# EAGLE board Bio Dome PiV (EAGLE 9.6.2), part 1 of 2
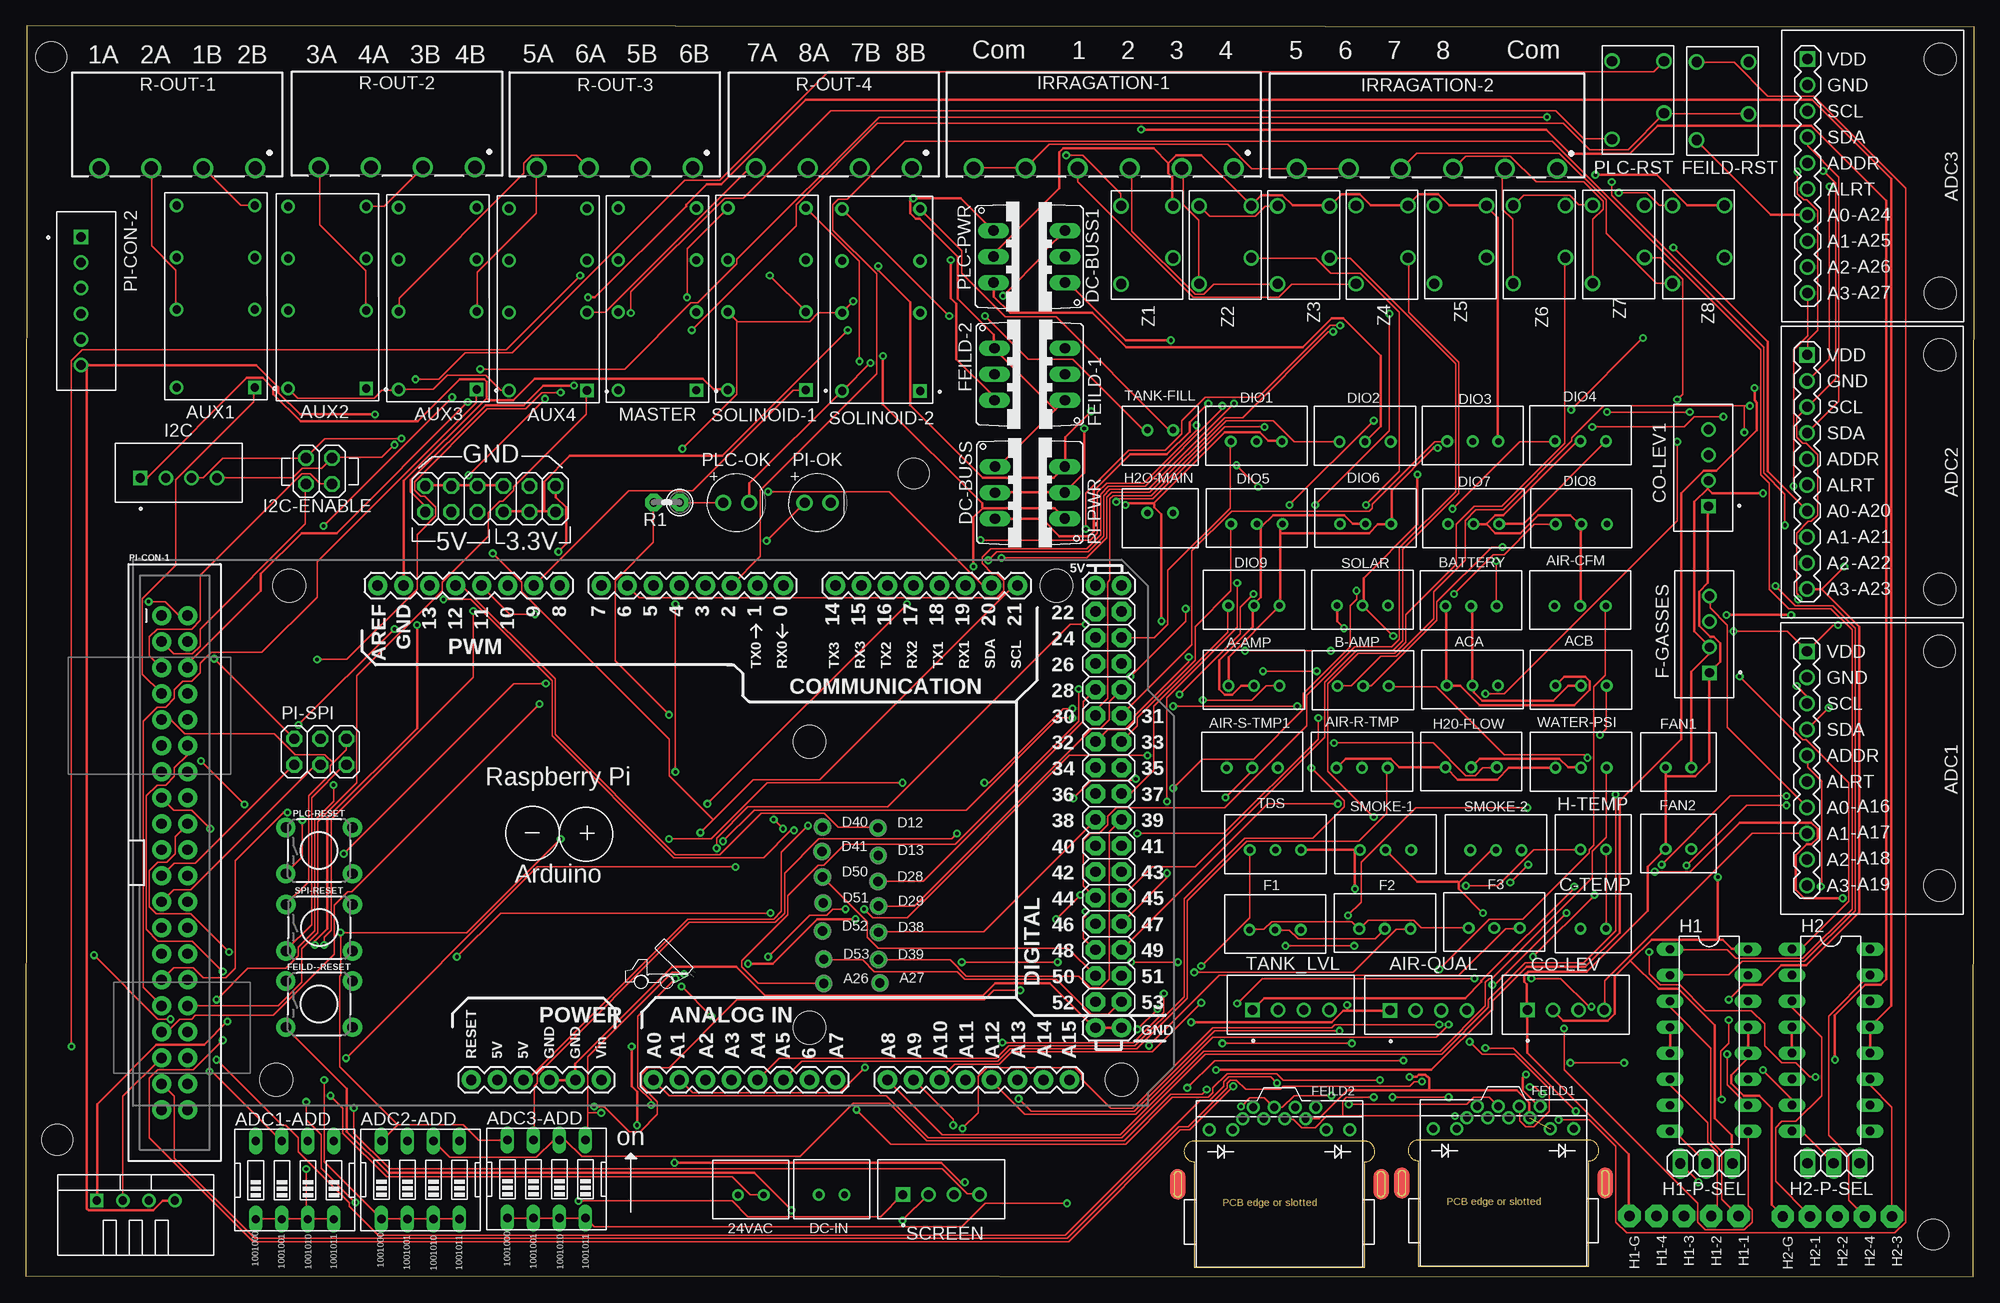
[diagram p0: board, top side]
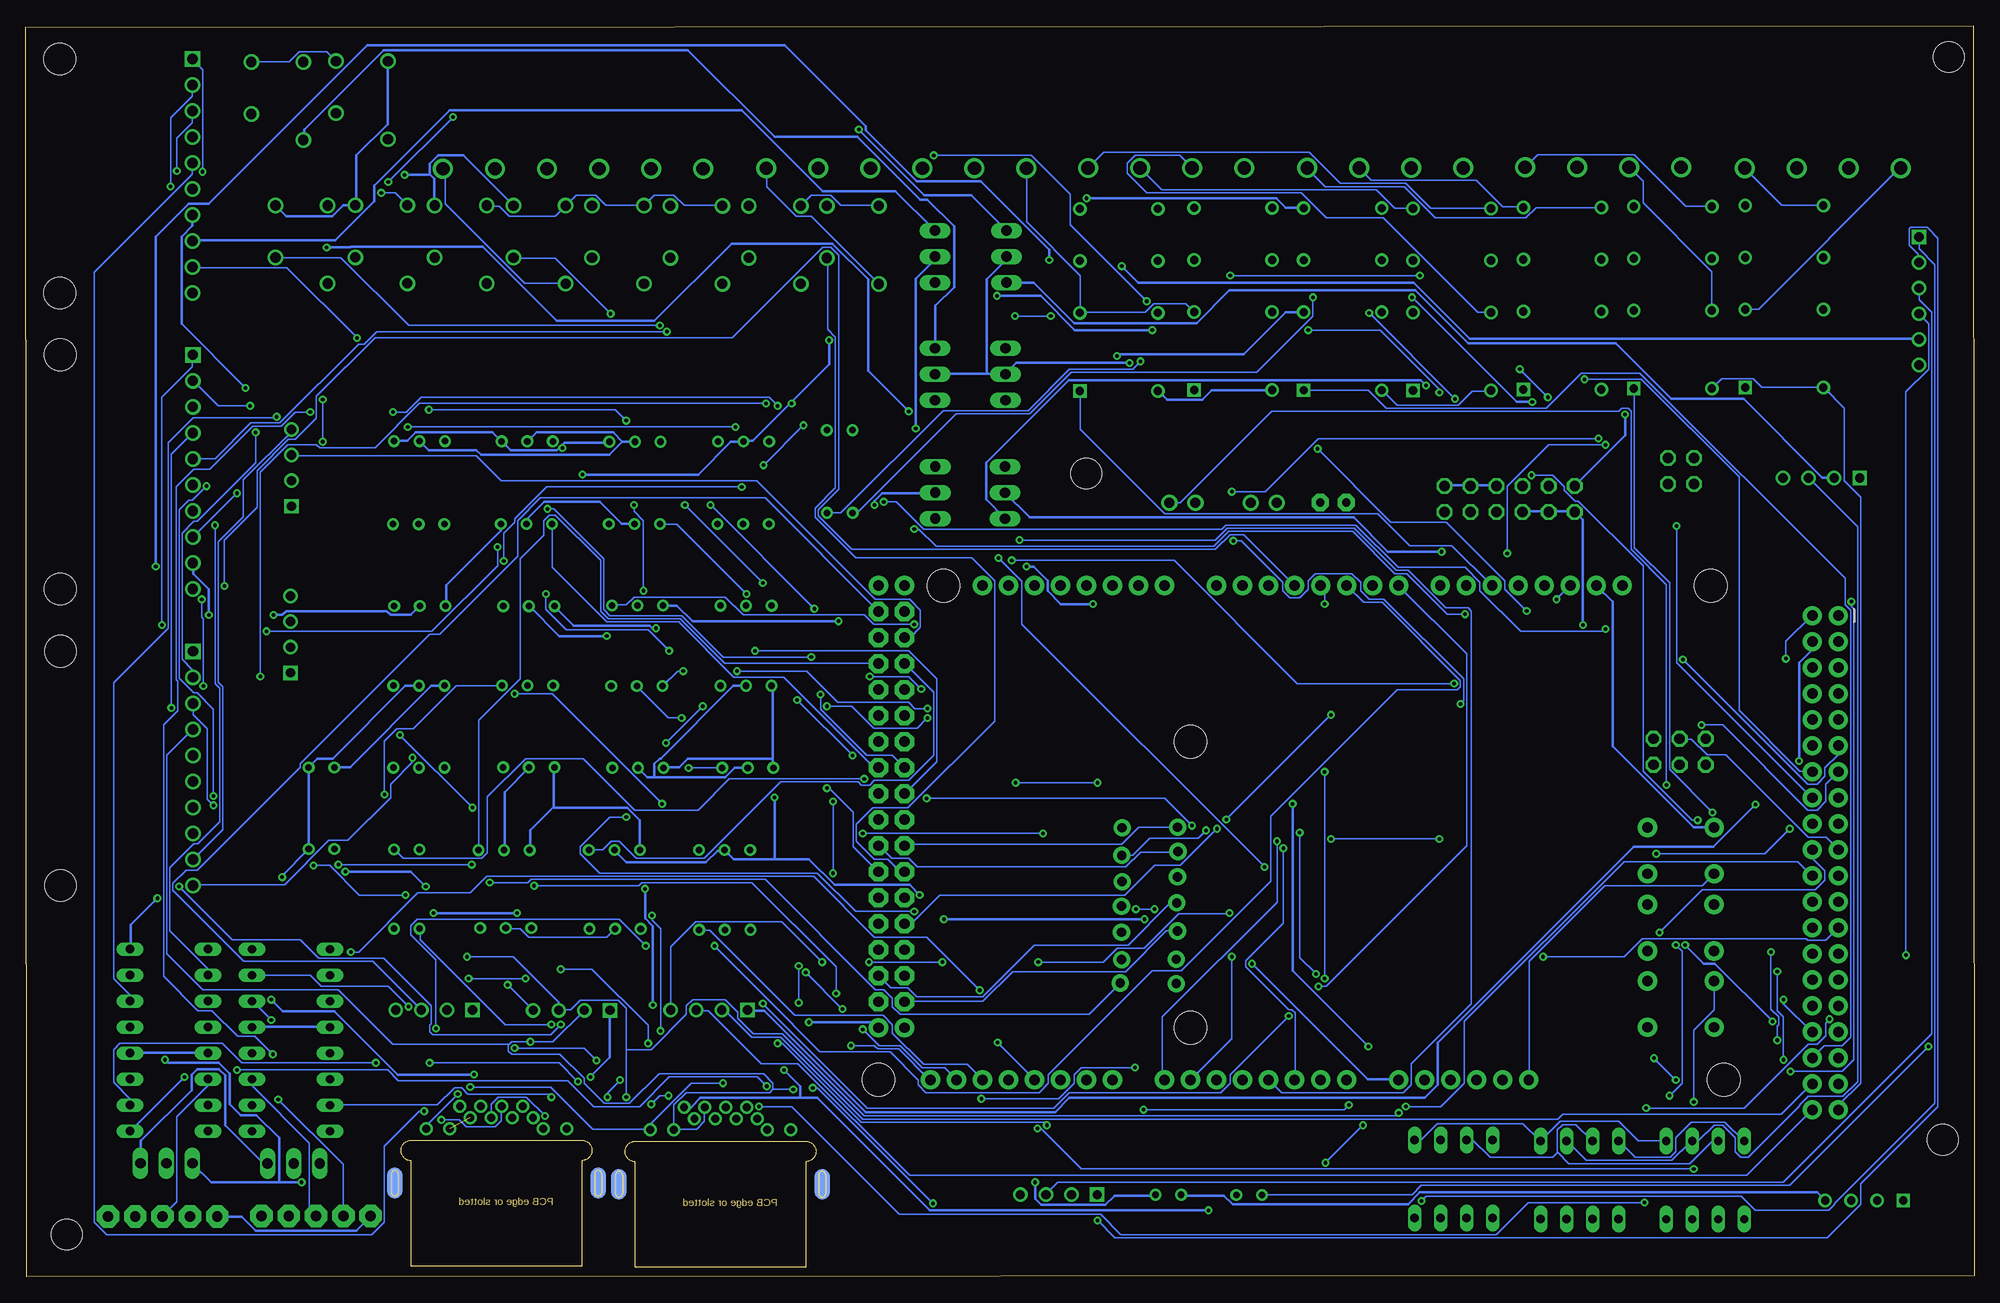
[diagram p1: board, bottom side, seen from below]

Size 190.31 x 122.19 mm. Coordinates in mm from the lower left corner, seen from the top.
Outline: 0,0.09 190.17,0 190.31,122.02 0.1,122.19 0,0.09
Copper layers (1*16): Top 0.035mm / dielectric 0.15mm / Bottom 0.035mm
Design rules "default *": minimum track width 6mil, minimum drill 0.35mm, track to track 6mil, track to pad 6mil, pad to pad 6mil, via to via 6mil, smd to smd 6mil, copper to edge 40mil, drill to drill 6mil, minimum pad ring 10mil, minimum via ring 8mil, stop-mask expansion 4mil, vias tented up to drill 0mil, thermal gap 10mil
Net classes: 1 Power: width 0.254 mm
Holes 3 mm at 3.09,13.38 2.5,119.12 186.28,4.14 86.73,78.46

## Footprints (pad centres in the part's own frame; a part is rotated, then mirrored left to right if it is on the bottom)
B2B-XH-A = drill 0.64: 1 0,0; 2 2.5,0
TESTPOINT_PAD-036 = drill 0.914 pad 1.676: 1 0,0
B3B-XH-A = drill 0.64: 1 0,0; 2 2.5,0; 3 5,0
ADC-4CH-ADS1115 = drill 1 square: 1 -6.35,11.43 | drill 1: 2 -6.35,8.89; 3 -6.35,6.35; 4 -6.35,3.81; 5 -6.35,1.27; 6 -6.35,-1.27; 7 -6.35,-3.81; 8 -6.35,-6.35; 9 -6.35,-8.89; 10 -6.35,-11.43 | hole 3.1: 6.604,11.43; 6.604,-11.43
EDG-04 = drill 0.813 long: 1 -3.81,-3.81; 2 -1.27,-3.81; 3 1.27,-3.81; 4 3.81,-3.81; 5 3.81,3.81; 6 1.27,3.81; 7 -1.27,3.81; 8 -3.81,3.81
B4B-XH-A(LF)(SN) = drill 0.9 square: 1 -3.75,0 | drill 0.9: 2 -1.25,0; 3 1.25,0; 4 3.75,0
C93432 = drill 0.8 square: 1 -10.16,-3.81 | drill 0.8: 4 -2.54,-3.81; 6 2.54,-3.81; 8 7.62,-3.81; 9 7.62,3.81; 11 2.54,3.81; 13 -2.54,3.81; 16 -10.16,3.81
ARDUINO_MEGA = drill 1.016 pad 1.88: 0 13.97,24.13; 1 11.43,24.13; 2 8.89,24.13; 3 6.35,24.13; 3.3V -13.97,-24.13; 4 3.81,24.13; 5 1.27,24.13; 5V@0 -11.43,-24.13; 5V@1 44.45,24.13; 5V@2 46.99,24.13; 6 -1.27,24.13; 7 -3.81,24.13; 8 -7.874,24.13; 9 -10.414,24.13; 10 -12.954,24.13; 11 -15.494,24.13; 12 -18.034,24.13; 13 -20.574,24.13; 14 19.05,24.13; 15 21.59,24.13; 16 24.13,24.13; 17 26.67,24.13; 18 29.21,24.13; 19 31.75,24.13; 20 34.29,24.13; 21 36.83,24.13; A0 1.27,-24.13; A1 3.81,-24.13; A2 6.35,-24.13; A3 8.89,-24.13; A4 11.43,-24.13; A5 13.97,-24.13; A6 16.51,-24.13; A7 19.05,-24.13; A8 24.13,-24.13; A9 26.67,-24.13; A10 29.21,-24.13; A11 31.75,-24.13; A12 34.29,-24.13; A13 36.83,-24.13; A14 39.37,-24.13; A15 41.91,-24.13; AREF -25.654,24.13; GND@0 -8.89,-24.13; GND@1 -6.35,-24.13; GND@2 44.45,-19.05; GND@3 46.99,-19.05; GND@4 -23.114,24.13; RESET -16.51,-24.13; VIN -3.81,-24.13 | drill 1.016 pad 1.88 octagon: 22 44.45,21.59; 23 46.99,21.59; 24 44.45,19.05; 25 46.99,19.05; 26 44.45,16.51; 27 46.99,16.51; 28 44.45,13.97; 29 46.99,13.97; 30 44.45,11.43; 31 46.99,11.43; 32 44.45,8.89; 33 46.99,8.89; 34 44.45,6.35; 35 46.99,6.35; 36 44.45,3.81; 37 46.99,3.81; 38 44.45,1.27; 39 46.99,1.27; 40 44.45,-1.27; 41 46.99,-1.27; 42 44.45,-3.81; 43 46.99,-3.81; 44 44.45,-6.35; 45 46.99,-6.35; 46 44.45,-8.89; 47 46.99,-8.89; 48 44.45,-11.43; 49 46.99,-11.43; 50 44.45,-13.97; 51 46.99,-13.97; 52 44.45,-16.51; 53 46.99,-16.51 | hole 3.2: -34.29,24.13; -35.56,-24.13; 16.51,8.89; 16.51,-19.05; 40.64,24.13; 46.99,-24.13
2X06 = drill 1.016 octagon: 1 -6.35,-1.27; 2 -6.35,1.27; 3 -3.81,-1.27; 4 -3.81,1.27; 5 -1.27,-1.27; 6 -1.27,1.27; 7 1.27,-1.27; 8 1.27,1.27; 9 3.81,-1.27; 10 3.81,1.27; 11 6.35,-1.27; 12 6.35,1.27
TO220V = drill 1.016 long: 1 -2.54,-2.54; 2 0,-2.54; 3 2.54,-2.54
RJ45-12+2P-16.3X15.4X11.5MM-IN = drill 0.762 pad 1.27: 1 3.57,7.5; 2 2.55,6.4; 3 1.53,7.5; 4 0.51,6.4; 5 -0.51,7.5; 6 -1.53,6.4; 7 -2.55,7.5; 8 -3.57,6.4; 9 6.86,5.32; 10 4.57,5.32; 11 -4.57,5.32; 12 -6.86,5.32 | smd 1.5 x 3 bottom: 13B -9.931,0; 14B 9.92,0 | smd 1.5 x 3: 13T -9.931,0; 14T 9.92,0
TACTILE_SWITCH_PTH_6.0MM = drill 1.016 pad 1.88: 1 -3.251,2.261; 2 3.251,2.261; 3 -3.251,-2.261; 4 3.251,-2.261
G6L-1PDC5 = drill 1: 2 -3.81,2.54; 4 3.81,2.54; 5 3.81,-2.54; 8 -1.27,-2.54
DIL16 = drill 0.813 long: 1 -8.89,-3.81; 2 -6.35,-3.81; 3 -3.81,-3.81; 4 -1.27,-3.81; 5 1.27,-3.81; 6 3.81,-3.81; 7 6.35,-3.81; 8 8.89,-3.81; 9 8.89,3.81; 10 6.35,3.81; 11 3.81,3.81; 12 1.27,3.81; 13 -1.27,3.81; 14 -3.81,3.81; 15 -6.35,3.81; 16 -8.89,3.81
DPADS_0400-S = drill 1.016 pad 2.184 octagon: PAD 0,0
1X03 = drill 1.016 long: 1 -2.54,0; 2 0,0; 3 2.54,0
2X02 = drill 1.016 octagon: 1 -1.27,-1.27; 2 -1.27,1.27; 3 1.27,-1.27; 4 1.27,1.27
691241500006 = drill 1.3: 1 -12.7,0; 2 -7.62,0; 3 -2.54,0; 4 2.54,0; 5 7.62,0; 6 12.7,0
2X20_SHROUDED = drill 1.016 pad 1.88: 1 -1.27,24.13; 2 1.27,24.13; 3 -1.27,21.59; 4 1.27,21.59; 5 -1.27,19.05; 6 1.27,19.05; 7 -1.27,16.51; 8 1.27,16.51; 9 -1.27,13.97; 10 1.27,13.97; 11 -1.27,11.43; 12 1.27,11.43; 13 -1.27,8.89; 14 1.27,8.89; 15 -1.27,6.35; 16 1.27,6.35; 17 -1.27,3.81; 18 1.27,3.81; 19 -1.27,1.27; 20 1.27,1.27; 21 -1.27,-1.27; 22 1.27,-1.27; 23 -1.27,-3.81; 24 1.27,-3.81; 25 -1.27,-6.35; 26 1.27,-6.35; 27 -1.27,-8.89; 28 1.27,-8.89; 29 -1.27,-11.43; 30 1.27,-11.43; 31 -1.27,-13.97; 32 1.27,-13.97; 33 -1.27,-16.51; 34 1.27,-16.51; 35 -1.27,-19.05; 36 1.27,-19.05; 37 -1.27,-21.59; 38 1.27,-21.59; 39 -1.27,-24.13; 40 1.27,-24.13
B6B-XH-A(LF)(SN) = drill 0.9 square: 1 -6.25,0 | drill 0.9: 2 -3.75,0; 3 -1.25,0; 4 1.25,0; 5 3.75,0; 6 6.25,0
LEDRD254W60D565H860B_B = drill 0.981 pad 1.581: 1 -1.27,0; 2 1.27,0
2X03 = drill 1.016 octagon: 1 -2.54,-1.27; 2 -2.54,1.27; 3 0,-1.27; 4 0,1.27; 5 2.54,-1.27; 6 2.54,1.27
0207/2V = drill 0.813 pad 1.676 octagon: 1 -1.27,0; 2 1.27,0
691241500004 = drill 1.3: 1 -7.62,0; 2 -2.54,0; 3 2.54,0; 4 7.62,0
TEMP-HUM-SENSOR-DHT22 = drill 0.8 square: 1 -3.81,0 | drill 0.8: 2 -1.27,0; 3 1.27,0; 4 3.81,0

## Placement (x,y rotation side)
24VAC  3A/250V  [B2B-XH-A]  72.07,8.01 180 top
A26  TESTPOINT_TPS-PAD-036  [TESTPOINT_PAD-036]  77.94,28.64 0 top
A27  TESTPOINT_TPS-PAD-036  [TESTPOINT_PAD-036]  83.41,28.7 0 top
A-AMP  3A/250V  [B3B-XH-A]  117.46,57.73 0 top
ACA  3A/250V  [B3B-XH-A]  138.79,57.76 0 top
ACB  3A/250V  [B3B-XH-A]  149.4,57.74 0 top
ADC1  ADC-4CH-ADS1115  [ADC-4CH-ADS1115]  180.3,49.66 0 top
ADC1-ADD  [EDG-04]  26.29,9.45 0 top
ADC2  ADC-4CH-ADS1115  [ADC-4CH-ADS1115]  180.33,78.61 0 top
ADC2-ADD  [EDG-04]  38.56,9.47 0 top
ADC3  ADC-4CH-ADS1115  [ADC-4CH-ADS1115]  180.37,107.5 0 top
ADC3-ADD  [EDG-04]  50.86,9.55 0 top
AIR-CFM  3A/250V  [B3B-XH-A]  149.31,65.52 0 top
AIR-QUAL  B4B-XH-A(LF)(SN)  [B4B-XH-A(LF)(SN)]  136.99,26.03 0 top
AIR-R-TMP  3A/250V  [B3B-XH-A]  128.01,49.72 0 top
AIR-S-TMP1  3A/250V  [B3B-XH-A]  117.29,49.72 0 top
AUX1  C93432  [C93432]  18.56,97.01 90 top
AUX2  C93432  [C93432]  29.45,96.92 90 top
AUX3  C93432  [C93432]  40.24,96.82 90 top
AUX4  C93432  [C93432]  51.02,96.72 90 top
B1  ARDUINO_MEGA_R3FULL  [ARDUINO_MEGA]  60.03,43.38 0 top
B-AMP  3A/250V  [B3B-XH-A]  128.12,57.71 0 top
BATTERY  3A/250V  [B3B-XH-A]  138.66,65.5 0 top
C-TEMP  3A/250V  [B2B-XH-A]  154.33,34.01 180 top
CO-LEV  B4B-XH-A(LF)(SN)  [B4B-XH-A(LF)(SN)]  150.41,26.06 0 top
CO-LEV1  B4B-XH-A(LF)(SN)  [B4B-XH-A(LF)(SN)]  164.34,79 90 top
D12  TESTPOINT_TPS-PAD-036  [TESTPOINT_PAD-036]  83.22,43.86 0 top
D13  TESTPOINT_TPS-PAD-036  [TESTPOINT_PAD-036]  83.26,41.17 0 top
D28  TESTPOINT_TPS-PAD-036  [TESTPOINT_PAD-036]  83.22,38.6 0 top
D29  TESTPOINT_TPS-PAD-036  [TESTPOINT_PAD-036]  83.29,36.21 0 top
D38  TESTPOINT_TPS-PAD-036  [TESTPOINT_PAD-036]  83.29,33.65 0 top
D39  TESTPOINT_TPS-PAD-036  [TESTPOINT_PAD-036]  83.27,30.99 0 top
D40  TESTPOINT_TPS-PAD-036  [TESTPOINT_PAD-036]  77.81,43.92 0 top
D41  TESTPOINT_TPS-PAD-036  [TESTPOINT_PAD-036]  77.76,41.55 0 top
D50  TESTPOINT_TPS-PAD-036  [TESTPOINT_PAD-036]  77.81,39.06 0 top
D51  TESTPOINT_TPS-PAD-036  [TESTPOINT_PAD-036]  77.89,36.52 0 top
D52  TESTPOINT_TPS-PAD-036  [TESTPOINT_PAD-036]  77.83,33.78 0 top
D53  TESTPOINT_TPS-PAD-036  [TESTPOINT_PAD-036]  77.94,31.02 0 top
DC-BUS  PINHD-2X6  [2X06]  45.38,75.98 0 top
DC-BUSS  LM7805_TO220V  [TO220V]  97.21,76.58 270 top
DC-BUSS1  LM7805_TO220V  [TO220V]  98.95,99.63 90 top
DC-IN  3A/250V  [B2B-XH-A]  79.97,8.02 180 top
DIO1  3A/250V  [B3B-XH-A]  117.69,81.58 0 top
DIO2  3A/250V  [B3B-XH-A]  128.3,81.55 0 top
DIO3  3A/250V  [B3B-XH-A]  138.82,81.59 0 top
DIO4  3A/250V  [B3B-XH-A]  149.34,81.61 0 top
DIO5  3A/250V  [B3B-XH-A]  117.73,73.53 0 top
DIO6  3A/250V  [B3B-XH-A]  128.35,73.53 0 top
DIO7  3A/250V  [B3B-XH-A]  138.9,73.52 0 top
DIO8  3A/250V  [B3B-XH-A]  149.42,73.5 0 top
DIO9  3A/250V  [B3B-XH-A]  117.45,65.55 0 top
F1  3A/250V  [B3B-XH-A]  119.53,33.89 0 top
F2  3A/250V  [B3B-XH-A]  130.24,33.99 0 top
F3  3A/250V  [B3B-XH-A]  140.92,34.08 0 top
F-GASSES  B4B-XH-A(LF)(SN)  [B4B-XH-A(LF)(SN)]  164.44,62.74 90 top
FAN1  3A/250V  [B2B-XH-A]  162.66,49.75 180 top
FAN2  3A/250V  [B2B-XH-A]  162.66,41.79 180 top
FEILD1  MJ88-BX11-RVSL2  [RJ45-12+2P-16.3X15.4X11.5MM-IN]  144.32,9.16 0 top
FEILD2  MJ88-BX11-RVSL2  [RJ45-12+2P-16.3X15.4X11.5MM-IN]  122.44,9.05 0 top
FEILD-1  LM7805_TO220V  [TO220V]  98.97,88.15 90 top
FEILD-2  LM7805_TO220V  [TO220V]  97.14,88.15 270 top
FEILD--RESET  MOMENTARY-SWITCH-SPST-PTH-6.0MM  [TACTILE_SWITCH_PTH_6.0MM]  28.66,26.64 0 top
FEILD-RST  G6L-1PDC5  [G6L-1PDC5]  165.72,114.83 90 top
H1  L293D  [DIL16]  164.4,23.11 270 top
H1-1  DPADS_PAD-0400-S  [DPADS_0400-S]  167.28,5.96 270 top
H1-2  DPADS_PAD-0400-S  [DPADS_0400-S]  164.61,5.96 270 top
H1-3  DPADS_PAD-0400-S  [DPADS_0400-S]  161.94,5.96 270 top
H1-4  DPADS_PAD-0400-S  [DPADS_0400-S]  159.28,5.96 270 top
H1-G  DPADS_PAD-0400-S  [DPADS_0400-S]  156.61,5.96 270 top
H1-P-SEL  PINHD-1X3  [1X03]  164.13,11.09 180 top
H2  L293D  [DIL16]  176.29,23.13 270 top
H2-1  DPADS_PAD-0400-S  [DPADS_0400-S]  174.26,5.91 270 top
H2-2  DPADS_PAD-0400-S  [DPADS_0400-S]  176.93,5.91 270 top
H2-3  DPADS_PAD-0400-S  [DPADS_0400-S]  182.26,5.91 270 top
H2-4  DPADS_PAD-0400-S  [DPADS_0400-S]  179.6,5.91 270 top
H2-G  DPADS_PAD-0400-S  [DPADS_0400-S]  171.6,5.91 270 top
H2-P-SEL  PINHD-1X3  [1X03]  176.56,11.1 180 top
H2O-MAIN  3A/250V  [B2B-XH-A]  109.54,74.61 0 top
H20-FLOW  3A/250V  [B3B-XH-A]  138.67,49.76 0 top
H-TEMP  3A/250V  [B2B-XH-A]  154.33,41.74 180 top
I2C  B4B-XH-A(LF)(SN)  [B4B-XH-A(LF)(SN)]  14.95,78.01 0 top
I2C-ENABLE  PINHD-2X2  [2X02]  28.66,78.7 0 top
IRRAGATION-1  [691241500006]  105.27,108.27 180 top
IRRAGATION-2  [691241500006]  136.85,108.21 180 top
MASTER  C93432  [C93432]  61.69,96.75 90 top
PI-CON-1  RASPBERRYPI-40-PIN-GPIO_PTH  [2X20_SHROUDED]  14.55,40.44 0 top
PI-CON-2  B6B-XH-A(LF)(SN)  [B6B-XH-A(LF)(SN)]  5.41,95.3 270 top
PI-OK  LED_BLUE  [LEDRD254W60D565H860B_B]  77.34,75.6 0 top
PI-PWR  LM7805_TO220V  [TO220V]  98.93,76.59 90 top
PI-SPI  PINHD-2X3  [2X03]  28.78,51.28 0 top
PLC-OK  LED_BLUE  [LEDRD254W60D565H860B_B]  69.4,75.59 0 top
PLC-PWR  LM7805_TO220V  [TO220V]  97.05,99.64 270 top
PLC-RESET  MOMENTARY-SWITCH-SPST-PTH-6.0MM  [TACTILE_SWITCH_PTH_6.0MM]  28.66,41.63 0 top
PLC-RST  G6L-1PDC5  [G6L-1PDC5]  157.45,114.91 90 top
R1  150  [0207/2V]  62.61,75.63 180 top
R-OUT-1  [691241500004]  14.82,108.29 180 top
R-OUT-2  [691241500004]  36.26,108.37 180 top
R-OUT-3  [691241500004]  57.53,108.29 180 top
R-OUT-4  [691241500004]  78.93,108.29 180 top
SCREEN  B4B-XH-A(LF)(SN)  [B4B-XH-A(LF)(SN)]  89.41,8.04 0 top
SMOKE-1  3A/250V  [B3B-XH-A]  130.31,41.68 0 top
SMOKE-2  3A/250V  [B3B-XH-A]  141.09,41.67 0 top
SOLAR  3A/250V  [B3B-XH-A]  128.05,65.57 0 top
SOLINOID-1  C93432  [C93432]  72.38,96.77 90 top
SOLINOID-2  C93432  [C93432]  83.54,96.68 90 top
SPI-RESET  MOMENTARY-SWITCH-SPST-PTH-6.0MM  [TACTILE_SWITCH_PTH_6.0MM]  28.68,34.1 0 top
TANK-FILL  3A/250V  [B2B-XH-A]  109.56,82.68 0 top
TANK_LVL  B4B-XH-A(LF)(SN)  [B4B-XH-A(LF)(SN)]  123.57,26.07 0 top
TDS  3A/250V  [B3B-XH-A]  119.55,41.69 0 top
U$1  TEMP-HUM-SENSOR-DHT22  [TEMP-HUM-SENSOR-DHT22]  10.76,7.46 0 top
WATER-PSI  3A/250V  [B3B-XH-A]  149.4,49.73 0 top
Z1  G6L-1PDC5  [G6L-1PDC5]  109.52,100.78 90 top
Z2  G6L-1PDC5  [G6L-1PDC5]  117.15,100.79 90 top
Z3  G6L-1PDC5  [G6L-1PDC5]  124.81,100.78 90 top
Z4  G6L-1PDC5  [G6L-1PDC5]  132.46,100.79 90 top
Z5  G6L-1PDC5  [G6L-1PDC5]  140.11,100.8 90 top
Z6  G6L-1PDC5  [G6L-1PDC5]  147.81,100.81 90 top
Z7  G6L-1PDC5  [G6L-1PDC5]  155.57,100.84 90 top
Z8  G6L-1PDC5  [G6L-1PDC5]  163.35,100.82 90 top

## Library data of the parts
24VAC C-TEMP DC-IN FAN1 FAN2 H2O-MAIN H-TEMP TANK-FILL = Connector; CATEGORY: CONNECTOR; DESCRIPTION: 2.5mm pitch/disconnectable crimp style connector; MANUFACTURER: JST (XH CONNECTOR); MPN: B2B-XH-A; OPERATING_TEMPERATURE: -25°C ~ 85°C; PART_STATUS: ACTIVE; ROHS_COMPLIANT: COMPLIANT; SERIES: B_B-XH-A; SUB_CATEGORY: Through hole connector; TYPE: top entry
A26 A27 D12 D13 D28 D29 D38-D41 D50-D53 = LinkedLibrary52101; BOM: EXCLUDE
A-AMP ACA ACB AIR-CFM AIR-R-TMP AIR-S-TMP1 B-AMP BATTERY DIO1-DIO9 F1-F3 H20-FLOW SMOKE-1 SMOKE-2 SOLAR TDS WATER-PSI = Connector; CATEGORY: CONNECTOR; DESCRIPTION: 2.5mm pitch/disconnectable crimp style connector; MANUFACTURER: JST (XH connector); MPN: B3B-XH-A; PART_STATUS: ACTIVE; ROHS_COMPLIANT: COMPLIANT; SERIES: B3B-XH-A; SUB_CATEGORY: THROUGH HOLE CONNECTOR; TYPE: SIDE ENTRY
ADC1-ADC3 U$1 = diy-modules
ADC1-ADD ADC2-ADD ADC3-ADD = special
AIR-QUAL CO-LEV CO-LEV1 F-GASSES I2C SCREEN TANK_LVL = Headers; CREATED_BY: PCBLayout.com; DIGIKEY_PARTNO: 455-2249-ND; MANUFACTURER: JST Sales America Inc.; MPN: B4B-XH-A(LF)(SN)
AUX1-AUX4 MASTER SOLINOID-1 SOLINOID-2 = Relay; CREATED_BY: PCBLayout.com; DIGIKEY_PARTNO: PB1642-ND; MANUFACTURER: TE Connectivity Potter & Brumfield Relays; MPN: C93432
B1 = SparkFun-Boards
DC-BUS H1-P-SEL H2-P-SEL I2C-ENABLE PI-SPI = Connector; CATEGORY: CONNECTOR; SUB-CATEGORY: PIN-HEADER
DC-BUSS DC-BUSS1 FEILD-1 FEILD-2 PI-PWR PLC-PWR = Tinkercad
FEILD1 FEILD2 = OPL_Connector; MPN: MJ88-BX11-RVSL2
FEILD--RESET PLC-RESET SPI-RESET = SparkFun-Switches; PROD_ID: SWCH-08441; SF_SKU: COM-00097
FEILD-RST PLC-RST Z1-Z8 = Relay; CREATED_BY: PCBLayout.com; DIGIKEY_PARTNO: Z1228-ND; MANUFACTURER: Omron Electronics Inc-EMC Div; MPN: G6L-1P DC5
H1 H2 = st-microelectronics; MPN: L293D; OC_FARNELL: 9589619; OC_NEWARK: 56P8249
H1-1-H1-4 H1-G H2-1-H2-4 H2-G = 52101-101-REV-A_v16; BOM: EXCLUDE
IRRAGATION-1 IRRAGATION-2 = Wurth_Connectors_WR-TBL Rising Cage Clamp; IR-UL: 14A; IR-VDE: 14A; PART-NUMBER: 691241500006; PINS: 6; PITCH: 5.08mm; TYPE: Vertical; WIRE: 14 to 30 (AWG) 2.08 to 0.0509 (mm²); WORKING-VOLTAGE-UL: 300V (AC); WORKING-VOLTAGE-VDE: 250V (AC)
PI-CON-1 = SparkFun-Connectors; PROD_ID: CONN-12263; SF_ID: PRT-13054
PI-CON-2 = Headers; CREATED_BY: PCBLayout.com; DIGIKEY_PARTNO: 455-2271-ND; MANUFACTURER: JST Sales America Inc.; MPN: B6B-XH-A(LF)(SN)
PI-OK PLC-OK = Opto-Electronic; CATEGORY: Opto-Electronic; SUB-CATEGORY: LED
R1 = adafruit
R-OUT-1-R-OUT-4 = Wurth_Connectors_WR-TBL Rising Cage Clamp; IR-UL: 14A; IR-VDE: 14A; PART-NUMBER: 691241500004; PINS: 4; PITCH: 5.08mm; TYPE: Vertical; WIRE: 14 to 30 (AWG) 2.08 to 0.0509 (mm²); WORKING-VOLTAGE-UL: 300V (AC); WORKING-VOLTAGE-VDE: 250V (AC)

## Nets
3.3V: PI-CON-1.17
A0: ACA.3 B1.A0
A1: ACB.3 B1.A1
A2: B1.A2 SOLAR.3
A3: B1.A3 BATTERY.3
A4: AIR-S-TMP1.3 B1.A4
A5: AIR-R-TMP.3 B1.A5
A6: A-AMP.3 B1.A6
A7: B1.A7 H20-FLOW.3
A8: B1.A8 WATER-PSI.3
A9: AIR-CFM.3 B1.A9
A10: B1.A10 TDS.1
CL-1: AUX1.13 R-OUT-1.3
CL-2: AUX2.13 R-OUT-2.3
CL-3: AUX3.13 R-OUT-3.3
CL-4: AUX4.13 R-OUT-4.3
CN-1: AUX1.4 R-OUT-1.4
CN-2: AUX2.4 R-OUT-2.4
CN-3: AUX3.4 R-OUT-3.4
CN-4: AUX4.4 R-OUT-4.4
CN-O-1: AUX1.9 R-OUT-1.1
CN-O-2: AUX2.9 R-OUT-2.1
CN-O-3: AUX3.9 R-OUT-3.1
CN-O-4: AUX4.9 R-OUT-4.1
D2: B1.2 H1.1
D3: B1.3 H1.2
D4: B1.4 H1.7
D5: B1.5 H1.9
D6: B1.6 H1.10
D7: B1.7 H1.15
D8: B1.8
D9: B1.9 SOLINOID-1.1
D10: B1.10 SOLINOID-2.1
D11: B1.11 Z8.8
D22: B1.22
D23: B1.23 CO-LEV.3
D24: B1.24 CO-LEV1.3
D25: B1.25 DIO1.1
D26: B1.26 SMOKE-1.3
D27: B1.27 SMOKE-2.3
D28: B1.28 D28.1
D30: B1.30 DIO2.1
D31: B1.31 DIO3.1
D32: B1.32 DIO4.1
D33: B1.33 DIO5.1
D34: B1.34 DIO6.1
D35: B1.35 DIO7.1
D36: B1.36 DIO8.1
D37: B1.37 DIO9.1
D42: B1.42 Z1.8
D43: B1.43 Z2.8
D44: B1.44 Z3.8
D45: B1.45 Z4.8
D47: B1.47 Z5.8
D48: B1.48 Z6.8
D49: B1.49 Z7.8
DC3.3V [Power]: ADC3.8 DC-BUS.7 DC-BUS.9 DC-BUS.11 DC-BUSS1.3
F1-OUT [Power]: ADC3.7 FEILD2.1 FEILD-1.3 FEILD--RESET.3 FEILD-RST.2
F2-OUT [Power]: ADC2.10 FEILD1.1 FEILD-2.3
GND: PI-CON-1.30
GND0 [Power]: A-AMP.1 AIR-CFM.1 AIR-QUAL.1 AIR-R-TMP.1 AIR-S-TMP1.1 B1.GND@0 B1.GND@1 B1.GND@2 B1.GND@3 B1.GND@4 DIO2.3 DIO3.3 DIO4.3 DIO5.3 DIO6.3 DIO7.3 DIO9.3 FEILD1.2 FEILD1.10 FEILD2.2 FEILD-1.2 FEILD-2.2 H20-FLOW.1 I2C.1 PLC-OK.2 PLC-PWR.2 PLC-RESET.1 PLC-RST.4 SMOKE-1.1 SMOKE-2.1 SOLINOID-1.16 SOLINOID-2.16 TDS.3 WATER-PSI.1 Z1.5 Z2.5 Z3.5 Z4.5 Z5.5 Z6.5 Z7.5 Z8.5
GND1 [Power]: ACA.1 ACB.1 BATTERY.1 CO-LEV1.1 CO-LEV.1 DC-BUS.2 DC-BUS.4 DC-BUS.6 DC-BUS.8 DC-BUS.10 DC-BUS.12 DC-BUSS1.2 DC-BUSS.2 DC-IN.2 DIO1.3 F-GASSES.1 FAN1.2 FAN2.2 H1-G.PAD H1.4 H1.5 H1.12 H1.13 H2-G.PAD PI-CON-2.6 PI-PWR.2 SOLAR.1 U$1.4
N$1: B1.13 D13.1
N$2: B1.A13 F1.3
N$3: B1.12 D12.1
N$4: FEILD-RST.8 PI-CON-1.11 PLC-RST.8
N$6: A26.1 ADC3.9
N$7: B1.A14 F2.3
N$8: B1.50 D50.1
N$9: ADC1-ADD.7 ADC1.1 ADC2-ADD.7 ADC2.1 ADC3-ADD.7 ADC3.1 B-AMP.2 PI-CON-1.2 PI-SPI.2
N$10: PLC-OK.1 R1.1
N$11: B1.A15 F3.3
N$12: F1.2 F2.2 F3.2
N$13: F1.1 F2.1 F3.1
N$14: F-GASSES.3
N$15: DIO8.3
N$16: B1.38 D38.1
N$17: ADC1.7 F-GASSES.4
N$18: AUX1.1 PI-CON-1.7
N$19: AUX2.1 PI-CON-1.29
N$20: AUX3.1 PI-CON-1.31
N$21: AUX4.1 PI-CON-1.32
N$22: AUX1.16 AUX2.16 AUX3.16 AUX4.16 MASTER.16 PI-CON-1.39
N$23: I2C-ENABLE.1 PI-CON-1.3
N$24: I2C-ENABLE.3 PI-CON-1.5
N$25: ADC1.8 CO-LEV.4
N$26: PI-CON-1.35 U$1.2
N$27: FEILD1.5 FEILD2.5 FEILD--RESET.1 FEILD-RST.4
N$28: ADC1.9 CO-LEV1.4
N$29 [Power]: DC-BUSS.1 FEILD-1.1 FEILD-2.1 H1-P-SEL.3 H2-P-SEL.3 MASTER.8 PLC-PWR.1
N$30: ADC3-ADD.1 ADC3-ADD.2 ADC3-ADD.3 ADC3-ADD.4 ADC3.5
N$31: B1.51 D51.1
N$32: B1.52 D52.1
N$33: B1.46 R1.2
N$34: B1.53 D53.1
N$35: B1.39 D39.1
N$36: B1.29 D29.1
N$37: A27.1 ADC3.10
N$39: H2.1 PI-CON-1.15
N$40: H2.2 PI-CON-1.16
N$41: H2.7 PI-CON-1.18
N$42: H2.10 PI-CON-1.37
N$43: H2.9 PI-CON-1.22
N$44: H2.14 PI-CON-1.13
N$45: IRRAGATION-1.1 Z1.2
N$46: IRRAGATION-1.2 Z2.2
N$47: B1.RESET PLC-RESET.3 PLC-RST.2
N$48: IRRAGATION-1.3 Z3.2
N$49: IRRAGATION-1.4 Z4.2
N$50: PI-CON-1.34 PI-OK.2
N$51: PI-CON-1.33 PI-OK.1
N$52: 24VAC.1 SOLINOID-1.13 SOLINOID-2.13 Z1.4 Z2.4 Z3.4 Z4.4 Z5.4 Z6.4 Z7.4 Z8.4
N$53: PI-CON-1.38 TANK_LVL.2
N$54: PI-CON-1.40 TANK_LVL.3
N$55: B1.A11 H-TEMP.2
N$56: B1.A12 C-TEMP.2
N$57: 24VAC.2 IRRAGATION-1.5 IRRAGATION-1.6 IRRAGATION-2.5 IRRAGATION-2.6 SOLINOID-1.4 SOLINOID-2.4
N$58: PI-CON-2.4 SCREEN.4
N$59: PI-CON-2.3 SCREEN.3
N$60 [Power]: H1-P-SEL.2 H1.8
N$61: PI-CON-2.2 SCREEN.2
N$62: ADC1-ADD.1 ADC1-ADD.2 ADC1-ADD.3 ADC1-ADD.4 ADC1.5
N$63: IRRAGATION-2.4 Z8.2
N$64 [Power]: DC-IN.1 MASTER.4 PI-PWR.1
N$65: PI-CON-2.1 SCREEN.1
N$66: H1-1.PAD H1.3
N$67: FEILD1.9 FEILD2.9 PI-CON-1.12
N$68: PI-CON-1.23 PI-SPI.3
N$69: PI-CON-1.21 PI-SPI.1
N$70: H1-2.PAD H1.6
N$71: SOLINOID-2.8 TANK-FILL.2
N$72: PI-CON-1.1
N$73: PI-CON-1.9 PI-SPI.6 SPI-RESET.1
N$74: PI-CON-1.19 PI-SPI.4
N$75: FEILD-RST.5 PI-CON-1.14 PLC-RST.5
N$76: ADC1-ADD.8 ADC1.2 ADC2-ADD.8 ADC2.2 ADC3-ADD.8 ADC3.2 B-AMP.1 PI-CON-1.20
N$77: PI-CON-1.25 TANK_LVL.4
N$78: B1.40 D40.1
N$79: H2O-MAIN.2 SOLINOID-1.8
N$80 [Power]: H2.16 PI-CON-1.4 TANK_LVL.1
N$81: H2O-MAIN.1 SOLINOID-1.9
N$82: SOLINOID-2.9 TANK-FILL.1
N$83: B1.5V@0 C-TEMP.1 H-TEMP.1
N$84: B1.41 D41.1
N$85: PI-SPI.5 SPI-RESET.3
N$86: IRRAGATION-2.3 Z7.2
N$87: IRRAGATION-2.2 Z6.2
N$88: IRRAGATION-2.1 Z5.2
N$89 [Power]: H2-P-SEL.2 H2.8
N$90: H1-3.PAD H1.11
N$91: H1-4.PAD H1.14
N$92: MASTER.1 PI-CON-1.36
N$93 [Power]: H2.4 H2.5 H2.12 H2.13 PI-CON-1.6
N$94: ADC1.10 B-AMP.3
N$95: H2-1.PAD H2.3
N$96: H2-2.PAD H2.6
N$97: H2-3.PAD H2.11
N$98: H2-4.PAD H2.15
N$99: ADC2-ADD.1 ADC2-ADD.2 ADC2-ADD.3 ADC2-ADD.4 ADC2.5
NO-N-1: AUX1.8 R-OUT-1.2
NO-N-2: AUX2.8 R-OUT-2.2
NO-N-3: AUX3.8 R-OUT-3.2
NO-N-4: AUX4.8 R-OUT-4.2
PI+ [Power]: ADC2.7 PI-CON-2.5 PI-PWR.3
SCL: ADC1-ADD.5 ADC1.3 ADC2-ADD.5 ADC2.3 ADC3-ADD.5 ADC3.3 AIR-QUAL.3 B1.21 FEILD1.4 FEILD2.4 I2C-ENABLE.4 I2C.4
SDA: ADC1-ADD.6 ADC1.4 ADC2-ADD.6 ADC2.4 ADC3-ADD.6 ADC3.4 AIR-QUAL.2 B1.20 FEILD1.3 FEILD2.3 FEILD2.10 I2C-ENABLE.2 I2C.3
VDD1 [Power]: ACA.2 ACB.2 ADC2.8 BATTERY.2 CO-LEV1.2 CO-LEV.2 DC-BUS.1 DC-BUS.3 DC-BUS.5 DC-BUSS1.1 DC-BUSS.3 DIO1.2 F-GASSES.2 FAN1.1 FAN2.1 H1-P-SEL.1 H1.16 H2-P-SEL.1 SOLAR.2 U$1.1
VDD2 [Power]: A-AMP.2 ADC2.9 AIR-CFM.2 AIR-QUAL.4 AIR-R-TMP.2 AIR-S-TMP1.2 B1.VIN DIO2.2 DIO3.2 DIO4.2 DIO5.2 DIO6.2 DIO7.2 DIO8.2 DIO9.2 H20-FLOW.2 I2C.2 PLC-PWR.3 SMOKE-1.2 SMOKE-2.2 TDS.2 WATER-PSI.2

## Tracks (layer width: path | path; a pad name or v marks a point on that pad's centre or on a via)
A0  (via drill 0.35)
  Top 0.152: v155.27,47.12 155.27,33.78 152.15,30.66 146.43,30.66 142.85,27.07 142.85,26.31 138.28,21.74 115.19,21.74 107.04,13.59 88.14,13.59 84.02,17.7 62.84,17.7 61.32,19.23 B1.A0
  Bottom 0.152: v155.27,47.12 155.27,52.3 154.05,53.52 152.45,53.52 148.26,57.71 143.84,57.71 ACA.3
A1  (via drill 0.35)
  Top 0.152: v153.75,52.91 154.36,53.52 154.36,57.71 ACB.3 | v146.66,45.82 135.76,45.82 130.43,40.49 130.43,36.6 v129.13,35.3 | v128.3,24.03 116.1,24.03 108.26,16.18 98.2,16.18 v96.98,17.4 | v81.97,20.45 79.53,18.01 65.13,18.01 63.91,19.23 B1.A1
  Bottom 0.152: v146.66,45.82 v153.75,52.91 | v129.13,35.3 129.13,34.85 128.3,34.01 v128.3,24.03 | v96.98,17.4 89.43,17.4 87.91,18.92 87.91,19.76 87.22,20.45 v81.97,20.45
A2  (via drill 0.35)
  Top 0.152: v103.53,63.73 102.01,63.73 84.18,45.9 70.54,45.9 67.49,42.85 v67.49,41.86
  Bottom 0.152: v103.53,63.73 107.49,63.73 108.41,64.64 120.22,64.64 121.97,66.39 130.89,66.39 131.65,65.63 133.02,65.63 SOLAR.3 | v67.49,41.86 67.49,34.54 71.15,30.88 71.15,30.28 66.95,26.08 66.65,26.08 66.35,25.78 66.35,19.3 B1.A2
A3  (via drill 0.35)
  Top 0.152: v143.61,69.9 143.61,65.56 BATTERY.3 | v118.24,79.27 v120.37,77.14 | v114.35,83.16 114.35,82.7 109.17,77.52 105.59,77.52 104.67,76.6 104.67,72.64 103.99,71.96 v93.24,71.96
  Bottom 0.152: v143.61,69.9 143.61,72.64 142.55,73.71 142.55,74.01 139.42,77.14 v120.37,77.14 | v114.35,83.16 v118.24,79.27 | v93.24,71.96 74.12,71.96 72.97,73.1 60.55,73.1 56.44,68.98 55.3,68.98 51.64,65.33 49.43,65.33 49.12,65.02 49.12,26.69 54.99,20.83 54.99,18.77 55.75,18.01 67.64,18.01 68.86,19.23 B1.A3
A4  (via drill 0.35)
  Top 0.152: v125.55,49.71 128.75,46.51 128.75,45.9 125.7,42.85 119.08,42.85 113.13,36.9 113.13,27.38 108.33,22.58 95.99,22.58 94.77,21.36 73.58,21.36 71.53,19.3 B1.A4
  Bottom 0.152: v125.55,49.71 122.35,49.71 AIR-S-TMP1.3
A5
  Top 0.152: AIR-R-TMP.3 132.94,49.71 132.94,45.29 130.2,42.54 119.23,42.54 113.44,36.75 113.44,27.23 108.48,22.27 96.14,22.27 94.92,21.05 75.79,21.05 74.04,19.3 B1.A5
A6  (via drill 0.35)
  Top 0.152: v114.96,56.34 119.76,56.34 121.13,57.71 122.43,57.71 A-AMP.3 | v109.55,50.93 101.93,50.93 86.08,35.08 82.73,35.08 v81.89,35.91 | v80.06,35.91 78.84,35.91 78.23,35.3 76.56,35.3 v72.52,31.27
  Bottom 0.152: v109.55,50.93 v114.96,56.34 | v80.06,35.91 v81.89,35.91 | v72.52,31.27 72.52,23.26 76.48,19.3 B1.A6
A7  (via drill 0.35)
  Top 0.152: v127.76,52.14 137.44,52.14 140.64,48.94 141.55,48.94 142.32,49.71 143.61,49.71 H20-FLOW.3 | v112.07,55.73 v124.18,55.73 | v102.24,54.58 100.86,54.58 91.87,45.59 71.15,45.59 v68.1,42.54
  Bottom 0.152: v124.18,55.73 v127.76,52.14 | v112.07,55.73 109.63,55.73 107.49,53.59 103.23,53.59 v102.24,54.58 | v68.1,42.54 68.1,36.6 79.3,25.4 79.3,19.45 79.15,19.3 B1.A7
A8
  Top 0.152: WATER-PSI.3 154.36,49.71 154.36,42.92 152.98,41.55 152.98,38.96 143.15,29.13 142.93,29.13 142.55,28.75 142.55,26.47 138.13,22.05 115.04,22.05 106.88,13.89 89.51,13.89 84.18,19.23 B1.A8
A9  (via drill 0.35)
  Top 0.152: v138.05,30.05 142.93,34.92 146.2,34.92 152.68,41.4 152.68,41.71 153.14,42.16 153.14,57.63 154.28,58.77 154.28,65.48 AIR-CFM.3 | v116.87,22.81 v129.51,22.81 | v90.58,14.81 90.58,15.42 86.77,19.23 B1.A9
  Bottom 0.152: v138.05,30.05 135,30.05 129.51,24.56 v129.51,22.81 | v116.87,22.81 116.41,22.81 108.71,15.11 90.88,15.11 v90.58,14.81
A10  (via drill 0.35)
  Top 0.152: v114.81,30.35 119.53,35.08 119.53,41.63 TDS.1 | v114.81,26.77 110.01,21.97 96.29,21.97 95.07,20.75 90.73,20.75 89.28,19.3 B1.A10
  Bottom 0.152: v114.81,26.77 v114.81,30.35
CL-1
  Top 0.152: AUX1.13 14.68,94.51 14.68,98.32 12.32,100.68 12.32,108.23 R-OUT-1.3
CL-2
  Bottom 0.152: AUX2.13 25.65,94.44 25.65,98.17 32.36,104.87 32.36,107.01 33.66,108.3 R-OUT-2.3
CL-3
  Top 0.152: AUX3.13 36.47,94.28 36.47,95.58 48.67,107.77 48.67,108.76 49.43,109.52 53.77,109.52 R-OUT-3.3
CL-4
  Bottom 0.152: AUX4.13 47.22,94.21 48.51,94.21 57.73,103.43 63.3,103.43 65.74,105.87 80.82,105.87 82.73,107.77 82.73,108.76 81.97,109.52 77.62,109.52 76.4,108.3 R-OUT-4.3
CN-1
  Bottom 0.152: AUX1.4 22.3,94.51 21.08,94.51 7.37,108.23 7.21,108.23 R-OUT-1.4
CN-2
  Top 0.152: AUX2.4 33.2,94.44 33.2,98.25 28.7,102.74 28.7,108.3 R-OUT-2.4
CN-3
  Top 0.152: AUX3.4 44.09,94.28 44.09,98.09 49.89,103.88 49.89,108.23 R-OUT-3.4
CN-4
  Top 0.152: AUX4.4 54.84,94.21 56.59,94.21 70.61,108.23 71.3,108.23 R-OUT-4.4
CN-O-1
  Bottom 0.152: AUX1.9 14.76,104.65 18.8,104.65 22.38,108.23 R-OUT-1.1
CN-O-2
  Bottom 0.152: AUX2.9 25.65,104.57 28.17,104.57 33.2,109.6 42.65,109.6 43.87,108.38 R-OUT-2.1
CN-O-3
  Bottom 0.152: AUX3.9 36.47,104.42 42.8,104.42 43.79,103.43 52.63,103.43 55.68,106.48 63.37,106.48 65.13,108.23 R-OUT-3.1
CN-O-4
  Bottom 0.152: AUX4.9 53.09,104.34 55.52,106.78 61.93,106.78 64.97,109.83 85.01,109.83 86.54,108.3 R-OUT-4.1
D2
  Top 0.152: H1.1 160.6,31.95 166.17,31.95 167.01,31.11 173.56,31.11 178.36,35.91 178.36,63.19 176.3,65.25 172.19,65.25 170.28,67.16 170.28,77.52 169.44,78.36 169.44,90.55 149.1,110.89 85.85,110.89 80.21,105.26 79.38,105.26 78.84,104.72 78.84,102.21 83.11,97.94 83.11,88.19 71.76,76.83 71.76,70.36 68.94,67.54 B1.2
D3  (via drill 0.35)
  Top 0.152: v170.89,67.46 172.8,65.56 176.45,65.56 178.66,63.35 178.66,35.76 173.71,30.81 167.61,30.81 166.32,29.51 160.6,29.51 H1.2
  Bottom 0.152: v170.89,67.46 170.89,71.96 167.69,75.16 167.69,78.74 164.64,81.79 163.96,81.79 161.9,83.84 161.9,85.98 156.18,91.69 121.29,91.69 112.45,100.53 111.68,100.53 110.92,99.77 110.92,76.91 112.9,74.93 112.9,74.32 109.63,71.04 74.12,71.04 72.67,72.49 71.37,72.49 66.42,67.54 B1.3
D4  (via drill 0.35)
  Top 0.152: v133.48,17.55 v138.96,17.55 | v132.26,19.23 122.81,19.23 122.2,19.84 117.32,19.84 115.95,18.46 115.95,18.01 115.49,17.55 111.99,17.55 107.42,12.98 84.48,12.98 v81.13,16.33 | v61.09,16.79 61.09,17.24 59.79,18.54 59.79,25.47 v63.45,29.13 | v63.45,65.71 v63.45,49.33
  Bottom 0.152: v138.96,17.55 139.27,17.85 147.12,17.85 147.73,18.46 148.41,18.46 150.09,16.79 160.53,16.79 H1.7 | v133.48,17.55 133.48,18.01 v132.26,19.23 | v81.13,16.33 61.54,16.33 v61.09,16.79 | v63.45,49.33 v63.45,29.13 | v63.45,65.71 63.45,67.08 63.83,67.46 B1.4
D5  (via drill 0.35)
  Top 0.152: v150.24,24.26 150.24,20.22 163.27,7.19 163.27,5.36 164.03,4.6 167.84,4.6 168.61,5.36 168.61,6.58 168.22,6.96 168.22,14.2 H1.9 | v123.04,32.33 v129.74,32.33
  Bottom 0.152: v150.24,24.26 150.24,30.96 152.68,33.4 152.68,34.31 152.07,34.92 132.33,34.92 v129.74,32.33 | v123.04,32.33 115.34,24.64 115.34,24.56 112.75,21.97 105.89,21.97 103.15,19.23 103.15,18.77 102.39,18.01 91.34,18.01 90.42,18.92 90.42,19.76 80.29,29.89 77.47,29.89 68.71,38.66 68.71,44.98 56.36,57.33 50.5,57.33 50.19,57.63 50.19,58.24 57.81,65.86 59.64,65.86 61.24,67.46 B1.5
D6  (via drill 0.35)
  Top 0.152: v166.17,21.74 166.17,18.77 168.15,16.79 H1.10 | v154.43,84.45 v162.51,84.45 | v116.87,85.06 116.87,84.76 109.32,77.21 105.74,77.21 104.98,76.45 104.98,72.49 103.61,71.12 94.23,71.12 93.4,70.28 93.4,69.67 94.39,68.68 94.84,68.68 95.53,67.99 95.53,67 94.84,66.32 59.94,66.32 58.8,67.46 B1.6
  Bottom 0.152: v166.17,21.74 167.92,23.49 169.6,23.49 172.11,26.01 173.48,26.01 176.84,29.36 176.84,53.9 175.46,55.27 175.46,58.16 175.62,58.32 175.62,77.14 173.86,78.89 172.34,78.89 168.15,83.08 165.33,83.08 163.96,84.45 v162.51,84.45 | v154.43,84.45 153.14,84.45 151.69,85.9 117.7,85.9 v116.87,85.06
D7  (via drill 0.35)
  Top 0.152: v152.91,26.39 152.68,26.39 149.94,29.13 v147.04,29.13 | v141.48,29.13 120.75,29.13 v118.31,26.69 | v64.06,28.37 v66.95,25.47
  Bottom 0.152: v152.91,26.39 154.89,28.37 161.44,28.37 162.51,29.44 168.15,29.44 H1.15 | v141.48,29.13 v147.04,29.13 | v118.31,26.69 108.1,16.48 89.89,16.48 88.37,18.01 73.58,18.01 72.67,18.92 72.67,19.76 v66.95,25.47 | v64.06,28.37 63.3,28.37 49.58,42.09 49.58,60.83 56.21,67.46 B1.7
D9
  Top 0.152: SOLINOID-1.1 76.17,86.59 74.96,86.59 65.13,76.76 58.88,76.76 49.66,67.54 B1.9
D10
  Bottom 0.152: SOLINOID-2.1 87.3,86.51 87.3,82.78 79.07,74.55 58.27,74.55 55.14,71.42 51.03,71.42 47.14,67.54 B1.10
D11  (via drill 0.35)
  Top 0.152: v128.37,92.91 127.38,92.91 120.37,85.9 115.19,85.9 112.9,83.62 112.9,82.32 111.3,80.72 107.72,80.72 103.53,76.53 v103.53,73.02 | v49.73,64.72 47.3,64.72 44.55,67.46 B1.11
  Bottom 0.152: v128.37,92.91 152.91,92.91 159.54,99.54 165.86,99.54 Z8.8 | v103.53,73.02 103.07,73.02 101.4,71.35 74.27,71.35 72.82,72.79 60.71,72.79 56.59,68.68 55.45,68.68 51.49,64.72 v49.73,64.72
D23
  Bottom 0.152: CO-LEV.3 151.69,26.08 156.41,30.81 168.99,30.81 175.92,37.74 175.92,38.43 174.63,39.72 173.56,39.72 163.5,49.78 163.5,50.09 150.85,62.74 149.86,62.74 142.24,70.36 142.24,73.86 140.03,76.07 118.08,76.07 107.04,65.02 B1.23
D24
  Bottom 0.152: CO-LEV1.3 164.26,80.19 146.28,80.19 143.84,77.75 118.92,77.75 107.34,66.17 103.99,66.17 102.92,65.1 102.92,63.42 103.91,62.43 104.45,62.43 B1.24
D25
  Top 0.152: DIO1.1 117.63,81.56 117.63,75.08 111.53,68.98 111.53,63.73 110.24,62.43 B1.25
D26
  Bottom 0.152: SMOKE-1.3 135.31,41.71 133.93,41.71 133.1,42.54 132.33,42.54 130.66,40.87 124.03,40.87 116.56,48.33 109.02,48.33 108.71,48.03 107.87,48.03 107.42,48.49 104.06,48.49 101.63,50.93 101.63,57.1 104.45,59.92 B1.26
D27
  Bottom 0.152: SMOKE-2.3 146.05,41.71 146.05,54.35 142.01,58.39 142.01,70.13 139.73,72.41 139.73,73.86 139.19,74.39 138.58,74.39 134.16,69.98 134.16,65.02 133.4,64.26 126.39,64.26 122.05,59.92 107.04,59.92 B1.27
D28
  Top 0.152: D28.1 83.26,38.66 87.68,38.66 103.3,54.28 103.3,56.18 104.45,57.33 B1.28
D30
  Top 0.152: DIO2.1 123.88,81.56 121.82,83.62 117.25,83.62 109.93,76.3 106.2,76.3 105.89,76 105.89,68.07 105.66,67.84 105.66,56.49 104.52,55.34 104.52,54.81 B1.30
D31
  Top 0.152: DIO3.1 138.81,81.56 137.59,81.56 131.5,75.46 131.5,75.08 131.19,74.78 117.78,74.78 113.89,70.89 113.89,61.75 106.96,54.81 B1.31
D32  (via drill 0.35)
  Top 0.152: v139.34,75 145.9,81.56 149.33,81.56 DIO4.1 | v113.59,60.53 113.59,60.07 108.26,54.74 108.26,54.35 107.34,53.44 105.66,53.44 104.52,52.3 B1.32
  Bottom 0.152: v139.34,75 138.74,75 133.86,70.13 133.86,65.17 133.25,64.57 126.24,64.57 122.2,60.53 v113.59,60.53
D33
  Top 0.152: DIO5.1 117.7,73.48 117.7,67 114.2,63.5 114.2,60.22 108.56,54.58 108.56,53.82 107.04,52.3 B1.33
D34  (via drill 0.35)
  Top 0.152: v119.91,66.7 118.62,65.4 118.62,62.81 v112.67,56.87
  Bottom 0.152: v119.91,66.7 126.7,73.48 128.3,73.48 DIO6.1 | v112.67,56.87 112.67,55.42 108.18,50.93 105.66,50.93 104.52,49.78 B1.34
D35
  Bottom 0.152: DIO7.1 138.89,73.48 138.89,69.29 133.55,63.96 126.54,63.96 121.13,58.55 116.26,58.55 107.49,49.78 107.04,49.78 B1.35
D36  (via drill 0.35)
  Top 0.152: v139.5,66.7 143.31,70.51 144.37,70.51 147.35,73.48 149.4,73.48 DIO8.1 | v119.08,61.14 v127.46,61.14
  Bottom 0.152: v139.5,66.7 139.5,65.17 137.52,63.19 129.51,63.19 v127.46,61.14 | v119.08,61.14 104.06,61.14 101.32,58.39 101.32,50.32 104.45,47.19 B1.36
D37
  Top 0.152: DIO9.1 117.4,65.48 117.4,62.96 110.16,55.73 110.16,49.48 107.87,47.19 B1.37
D42
  Bottom 0.152: Z1.8 111.99,99.46 111.99,92.53 111.23,91.77 111.23,77.06 113.21,75.08 113.21,74.17 109.25,70.2 97.89,70.2 95.68,67.99 95.68,54.28 104.14,45.82 107.57,45.82 109.17,44.22 109.17,42.54 107.42,40.79 106.12,40.79 104.9,39.57 104.52,39.57 B1.42
D43  (via drill 0.35)
  Top 0.152: v130.89,75.39 134.16,78.66 134.16,94.21 130.35,98.02 127.46,98.02 126.01,99.46 119.76,99.46 Z2.8 | v129.97,67 129.97,66.17 129.36,65.56 129.36,61.52 124.79,56.95 124.79,55.42 119.91,50.54 114.88,50.54 v112.07,47.72
  Bottom 0.152: v130.89,75.39 130.89,74.78 129.97,73.86 v129.97,67 | v112.07,47.72 111.84,47.72 109.47,45.36 109.47,42.01 B1.43
D44
  Top 0.152: Z3.8 127.38,99.46 129.36,99.46 139.65,89.18 139.65,76.68 134.16,71.19 134.16,62.28 133.4,61.52 129.82,61.52 125.1,56.79 125.1,53.82 117.09,45.82 106.5,45.82 105.66,44.98 105.66,44.14 104.83,43.31 103.99,43.31 103.3,42.62 103.3,38.2 104.45,37.06 B1.44
D45
  Top 0.152: Z4.8 135.08,99.46 135.08,94.21 139.95,89.33 139.95,76.53 134.47,71.04 134.47,62.13 133.55,61.21 129.97,61.21 126.85,58.09 126.85,52.68 114.2,40.03 110.01,40.03 107.04,37.06 B1.45
D47  (via drill 0.35)
  Top 0.152: v133.17,94.05 133.17,82.62 v125.93,75.39 | v118.31,67.77 118.31,63.42 111.46,56.56 v111.46,46.43 | v111.46,39.42 111.46,38.96 107.04,34.54 B1.47
  Bottom 0.152: v133.17,94.05 138.58,99.46 142.62,99.46 Z5.8 | v118.31,67.77 v125.93,75.39 | v111.46,39.42 v111.46,46.43
D48  (via drill 0.35)
  Top 0.152: v131.65,44.91 127.15,49.4 127.15,57.94 130.12,60.91 133.71,60.91 134.77,61.97 134.77,64.64 139.73,69.59 139.73,73.48 141.48,75.23 144.15,75.23 150.32,81.41 150.32,99.54 Z6.8 | v103.53,35.69 103.53,35.23 103.3,35 103.3,33.09 104.45,31.95 B1.48
  Bottom 0.152: v131.65,44.91 133.25,44.91 136.14,42.01 136.14,41.32 134.24,39.42 112.98,39.42 109.25,35.69 v103.53,35.69
D49  (via drill 0.35)
  Top 0.152: v161.29,85.67 161.82,86.21 161.82,97.41 159.69,99.54 158.17,99.54 Z7.8 | v161.29,81.56 161.29,73.86 144.37,56.95 v142.55,56.95 | v128.14,46.2 121.29,46.2 B1.49
  Bottom 0.152: v161.29,81.56 v161.29,85.67 | v142.55,56.95 138.89,56.95 v128.14,46.2
DC3.3V  (via drill 0.35)
  Top 0.254: DC-BUS.7 46.69,74.78 49.12,74.78 DC-BUS.9 49.28,74.78 50.65,74.78 | 50.65,74.78 51.71,74.78 DC-BUS.11 | 50.65,74.78 50.65,77.67 53.16,80.19 68.02,80.19 v80.29,92.45 | v95.45,95.81 99.64,100 99.64,100.3 101.47,102.13 DC-BUSS1.3
  Bottom 0.254: ADC3.8 174.02,101.22 160.07,101.22 156.26,105.03 156.26,106.55 148.87,113.94 120.37,113.94 112.45,106.02 105.36,106.02 101.55,102.21 DC-BUSS1.3 | v80.29,92.45 87.83,92.45 91.19,95.81 v95.45,95.81
F1-OUT  (via drill 0.35)
  Top 0.254: ADC3.7 174.02,103.73 170.43,103.73 163.2,110.97 FEILD-RST.2 | v74.8,6.5 71.15,10.16 35.41,10.16 31.37,14.2 31.37,18.39 25.43,24.33 FEILD--RESET.3 | v168.83,86.82 168.83,85.6 169.06,85.37 169.06,82.7 165.1,78.74 163.88,78.74 161.67,76.53 161.67,52.53 155.65,46.51 155.65,33.63 152.3,30.28 146.58,30.28 143.23,26.92 143.23,26.16 137.29,20.22 v116.26,20.22
  Bottom 0.254: FEILD-1.3 101.47,90.7 101.47,94.82 99.64,96.65 99.64,102.59 102.24,105.18 102.92,105.18 109.09,111.35 117.17,111.35 125.63,119.81 155.35,119.81 163.12,112.04 163.12,111.05 FEILD-RST.2 | 114.66,17.47 112.98,17.47 102.01,6.5 v74.8,6.5 | 114.66,17.47 124.41,17.47 125.32,16.56 FEILD2.1 | ADC3.7 174.02,102.67 175.08,101.6 175.08,93.06 v168.83,86.82 | v116.26,20.22 114.66,18.62 114.66,17.47
F2-OUT  (via drill 0.35)
  Top 0.254: v146.51,19.76 146.2,19.45 146.2,18.24 147.73,16.71 147.88,16.71 FEILD1.1 | v166.32,27.07 167.77,28.52 169.52,28.52 171.42,30.43 173.86,30.43 179.04,35.61 179.04,63.5 175.39,67.16 | 175.39,67.16 174.02,67.16 ADC2.10 | v90.35,99.31 90.35,95.58 90.88,95.05 90.88,89.63 94.54,85.98 94.54,85.67 FEILD-2.3 | 175.39,67.16 v177.6,69.37
  Bottom 0.254: v146.51,19.76 153.98,19.76 160.15,25.93 165.18,25.93 v166.32,27.07 | v90.35,99.31 90.35,100.3 97.05,107.01 103.3,107.01 108.26,111.96 108.26,112.34 116.18,120.27 156.95,120.27 172.42,104.8 174.4,104.8 177.6,101.6 v177.6,69.37
GND0  (via drill 0.35)  (1 unrouted)
  Top 0.254: PLC-OK.2 70.69,75.61 70.69,77.52 79.68,86.51 SOLINOID-2.16 79.83,86.59 v82.5,89.25 | 45.01,85.82 45.01,87.43 44.78,87.65 42.42,87.65 38.3,83.54 26.87,83.54 24.21,86.21 24.21,86.74 23.14,87.81 21.62,87.81 11.86,78.05 11.25,78.05 I2C.1 | 45.01,85.82 36.93,77.75 36.93,67.54 B1.GND@4 | 45.01,85.82 45.24,85.6 47.6,85.6 49.73,87.73 66.12,87.73 67.18,86.66 68.55,86.66 SOLINOID-1.16 | 137.06,18.24 145.59,18.24 146.81,17.02 146.81,15.57 FEILD1.2 | 137.06,18.24 129.06,18.24 126.31,15.49 125.02,15.49 FEILD2.2 | v135.15,19.53 135.84,19.53 136.07,19.76 136.68,19.76 137.06,19.38 137.06,18.24 | B1.GND@0 51.18,19.23 53.62,19.23 B1.GND@1 53.7,19.38 53.7,20.83 63.14,30.28 69.39,30.28 72.21,27.46 93.47,27.46 94.69,28.67 100.03,28.67 104.37,24.33 B1.GND@2 104.52,24.33 106.96,24.33 B1.GND@3 | 129.06,26.01 128.68,26.01 127.53,24.86 v113.82,24.86 | 129.06,26.01 133.17,26.01 AIR-QUAL.1 | TDS.3 124.56,41.71 130.28,41.71 SMOKE-1.1 129.82,41.63 v129.82,37.9 | WATER-PSI.1 149.33,49.71 144.83,49.71 143.69,48.56 139.88,48.56 138.74,49.71 H20-FLOW.1 138.58,49.78 134.16,49.78 133.32,50.62 128.91,50.62 128.07,49.78 AIR-R-TMP.1 | 122.5,72.64 122.5,73.33 122.66,73.48 DIO5.3 | 122.5,72.64 122.5,65.56 DIO9.3 122.43,65.48 117.48,60.53 117.48,57.78 A-AMP.1 | 122.5,72.64 131.19,72.64 132.03,73.48 133.32,73.48 DIO6.3 133.4,73.63 133.4,76.83 137.52,80.95 v137.9,80.95 | DIO7.3 143.92,73.56 146.28,73.56 154.28,81.56 DIO4.3 | 111.61,108.76 111.61,107.77 111.99,107.39 111.99,104.65 Z1.5 | 111.61,108.76 112.37,109.52 114.81,109.52 119.69,104.65 Z2.5 119.76,104.72 120.68,105.64 122.73,105.64 123.72,104.65 127.31,104.65 Z3.5 127.46,104.65 128.52,105.71 130.28,105.71 131.34,104.65 135,104.65 Z4.5 135.08,104.72 136.07,105.71 137.97,105.71 139.04,104.65 142.62,104.65 Z5.5 142.7,104.49 143.76,103.43 143.76,81.63 DIO3.3
  Top 0.254: 111.61,108.76 110.16,110.21 101.32,110.21 100.94,109.83 100.94,106.32 94.54,99.92 94.54,99.69 PLC-PWR.2 | v153.29,107.62 159.31,107.62 162.28,104.65 165.86,104.65 Z8.5 | v129.06,26.54 129.06,26.01
  Bottom 0.254: SOLINOID-1.16 68.63,86.59 74.5,86.59 75.41,85.67 78.84,85.67 79.68,86.51 SOLINOID-2.16 | PLC-RESET.1 25.43,43.91 27.41,43.91 35.33,51.84 35.33,65.94 36.86,67.46 B1.GND@4 | v135.15,19.53 133.25,21.44 133.25,26.01 AIR-QUAL.1 | v113.82,24.86 107.57,24.86 B1.GND@3 | 138.74,45.9 141.02,43.61 141.02,41.71 SMOKE-2.1 | 138.74,45.9 138.74,49.71 H20-FLOW.1 | SMOKE-1.1 130.35,41.71 130.35,44.6 131.57,45.82 138.66,45.82 138.74,45.9 | 117.32,50.62 117.32,57.63 117.4,57.71 A-AMP.1 | 117.32,50.62 117.32,49.78 AIR-S-TMP1.1 | 117.32,50.62 125.63,50.62 126.47,49.78 127.99,49.78 AIR-R-TMP.1 | DIO7.3 143.92,73.48 143.92,72.87 149.25,67.54 149.25,65.56 AIR-CFM.1 | 138.05,81.1 138.43,80.72 142.93,80.72 143.76,81.56 DIO3.3 143.92,81.63 144.75,82.47 152.22,82.47 153.06,81.63 154.28,81.63 DIO4.3 | 138.05,81.1 137.67,81.48 133.32,81.48 DIO2.3 | Z8.5 165.86,104.57 164.87,103.58 160.38,103.58 159.31,104.65 158.17,104.65 Z7.5 158.01,104.72 158.01,109.52 154.97,112.57 154.97,118.67 PLC-RST.4 | 96.44,88.19 101.47,88.19 FEILD-1.2 | 96.44,88.19 94.62,88.19 FEILD-2.2 94.54,88.26 93.55,89.25 v82.5,89.25 | 96.44,88.19 96.44,97.41 94.54,99.31 94.54,99.62 PLC-PWR.2 | 150.85,107.69 150.39,107.24 150.39,104.65 Z6.5 | 150.85,107.69 150.85,108.68 150.01,109.52 147.57,109.52 142.7,104.65 Z5.5 | v153.29,107.62 150.93,107.62 150.85,107.69 | v137.9,80.95 138.05,81.1 | v129.06,26.54 129.06,34.24 129.82,35 v129.82,37.9
GND1  (via drill 0.35)
  Top 0.254: DC-BUS.8 46.61,77.29 44.17,77.29 DC-BUS.6 44.02,77.29 41.66,77.29 DC-BUS.4 41.5,77.29 39.07,77.29 DC-BUS.2 | v34.11,84.22 26.8,84.22 24.66,86.36 24.66,86.89 22.53,89.03 5.46,89.03 PI-CON-2.6 5.99,88.95 5.99,6.65 6.15,6.5 12.47,6.5 13.39,7.42 14.53,7.42 U$1.4 | 110.16,75.54 117.09,82.47 120.52,82.47 121.36,81.63 122.66,81.63 DIO1.3 | 110.16,75.54 107.57,75.54 v107.42,75.39 | DC-BUSS.2 94.69,76.6 101.47,76.6 PI-PWR.2 101.55,76.68 103.38,78.51 v103.38,82.85 | H1.5 160.6,21.89 160.6,24.33 H1.4 | H1.13 168.22,24.33 168.22,21.89 H1.12 168.15,21.74 168.15,21.28 166.55,19.68 166.55,18.92 167.77,17.7 169.29,17.7 170.51,16.48 170.51,7.03 171.58,5.97 H2-G.PAD | H1-G.PAD 156.57,5.97 156.57,11.99 146.66,21.89 146.66,26.01 CO-LEV.1 146.58,26.16 146.58,28.6 146.36,28.83 146.36,29.44 146.74,29.82 152.45,29.82 158.39,35.76 158.39,40.03 160.07,41.71 FAN2.2 160.15,41.86 160.15,48.87 | BATTERY.1 138.74,65.48 138.74,57.78 ACA.1 138.89,57.71 140.11,57.71 142.01,55.8 151.23,55.8 152.76,57.33 152.76,58.16 152.3,58.62 150.24,58.62 149.4,57.78 ACB.1 | v128.75,63.35 128.07,64.03 128.07,65.56 SOLAR.1 | 160.15,48.87 160.15,49.71 FAN1.2 | 160.15,48.87 163.04,48.87 164.41,50.24 164.41,58.93 F-GASSES.1 164.49,59.08 165.48,60.07 165.48,61.9 164.87,62.51 164.49,62.51 163.42,63.57 163.42,66.93 164.26,67.77 164.26,75.23 CO-LEV1.1 | v110.92,64.03 110.92,74.47 110.24,75.16 110.24,75.46 110.16,75.54 | v52.02,70.81 52.78,71.58 52.78,75.16 51.79,76.15 51.79,77.21 DC-BUS.12
  Bottom 0.254: DC-IN.2 77.39,7.95 73.28,7.95 72.44,7.11 55.3,7.11 54.15,8.25 15.37,8.25 14.61,7.49 U$1.4 | DC-BUS.8 46.69,77.29 49.12,77.29 DC-BUS.10 49.28,77.29 51.71,77.29 DC-BUS.12 | v34.11,84.22 34.11,82.17 38.99,77.29 DC-BUS.2 | v107.42,75.39 107.42,75.77 106.65,76.53 101.47,76.53 PI-PWR.2 | v103.38,82.85 103.38,97.48 101.55,99.31 101.55,99.62 DC-BUSS1.2 | H1.4 160.6,24.41 168.15,24.41 H1.13 | H2-G.PAD 171.58,5.89 169.22,5.89 167.84,4.52 158.01,4.52 156.64,5.89 H1-G.PAD | v128.75,63.35 129.13,63.35 129.36,63.57 136.75,63.57 138.66,65.48 BATTERY.1 | ACB.1 149.4,57.71 150.7,57.71 158.62,49.78 160.15,49.78 FAN1.2 | v110.92,64.03 125.17,64.03 126.7,65.56 127.99,65.56 SOLAR.1 | v52.02,70.81 57.28,70.81 60.63,74.17 92.25,74.17 DC-BUSS.2
N$1  (via drill 0.35)
  Top 0.152: v75.03,43.61 74.73,43.61 72.06,40.94 63.3,40.94 51.41,52.83 51.41,58.24 43.49,66.17 v40.82,66.17
  Bottom 0.152: v75.03,43.61 75.79,42.85 80.52,42.85 82.19,41.17 D13.1 | v40.82,66.17 39.52,67.46 B1.13
N$2
  Bottom 0.152: F1.3 124.49,33.86 123.5,33.86 115.19,25.55 106.58,25.55 105.66,24.64 105.66,23.8 102.62,20.75 98.35,20.75 96.9,19.3 B1.A13
N$3
  Top 0.152: D12.1 83.19,43.91 79.38,43.91 78,45.29 71.83,45.29 67.79,41.25 63.45,41.25 51.71,52.98 51.71,58.39 42.65,67.46 42.04,67.46 B1.12
N$4  (via drill 0.35)
  Top 0.152: FEILD-RST.8 160.07,113.56 PLC-RST.8 159.99,113.56 156.49,110.06 152.76,110.06 150.17,112.65 83.19,112.65 75.26,104.72 75.26,102.67 v65.05,92.45 | v28.47,60.3 31.37,60.3 38.23,67.16 38.23,72.49 40.06,74.32 40.06,75.16 38.99,76.22 38.61,76.22 38,76.83 38,77.67 45.09,84.76 48.82,84.76 50.42,86.36 v52.25,86.36
  Bottom 0.152: v28.47,60.3 16.28,48.11 15.37,48.11 14.61,48.87 14.61,49.71 13.31,51 13.31,51.84 PI-CON-1.11 | v52.25,86.36 52.25,86.66 58.04,92.45 v65.05,92.45
N$6  (via drill 0.35)
  Top 0.152: v150.93,84.68 v157.94,91.69 | v123.42,75.39 v131.65,83.62 | v113.28,65.25 113.28,64.03 v107.87,58.62 | v102.84,57.4 102.84,54.28 90.81,42.24 79.98,42.24 77.93,40.18 77.39,40.18 74.42,37.21 74.42,35.38 69.93,30.88 69.93,30.28 71.53,28.67 77.93,28.67 A26.1
  Bottom 0.152: v157.94,91.69 164.8,98.55 174.02,98.55 ADC3.9 | v150.93,84.68 132.72,84.68 v131.65,83.62 | v113.28,65.25 v123.42,75.39 | v107.87,58.62 104.06,58.62 v102.84,57.4
N$7  (via drill 0.35)
  Top 0.152: v114.12,29.74 129.67,29.74 133.86,33.93 135.23,33.93 F2.3 | v108.56,24.18 v110.54,26.16
  Bottom 0.152: v110.54,26.16 v114.12,29.74 | v108.56,24.18 106.96,22.58 104.9,22.58 102.77,20.45 100.56,20.45 99.42,19.3 B1.A14
N$8
  Top 0.152: D50.1 77.85,39.04 82.19,34.69 82.19,33.17 83.26,32.1 101.78,32.1 104.45,29.44 B1.50
N$9  (via drill 0.35)
  Top 0.152: v18.42,60.37 PI-SPI.2 | v12.01,65.94 13.61,65.94 14.91,64.64 15.82,64.64 PI-CON-1.2 | v17.96,20.06 18.19,20.06 24.97,13.28 ADC1-ADD.7 | v173.03,107.92 173.03,105.79 173.63,105.18 173.94,105.18 175.01,104.11 175.01,92.45 174.02,91.46 174.02,90.09 ADC2.1 | v144.22,71.27 143.15,71.27 137.82,65.94 137.82,64.11 131.42,57.71 130.66,57.71 B-AMP.2 | v166.78,63.04 172.03,63.04 173.94,61.14 ADC1.1 174.02,61.14 176.53,63.65 v176.99,63.65 | v90.96,43.31 90.42,42.77 77.47,42.77 74.12,39.42 74.12,35.53 73.2,34.62 64.82,34.62 49.96,19.76 49.96,18.92 49.66,18.62 49.66,13.36 ADC3-ADD.7 | v108.56,43.31 117.02,43.31 126.24,52.53 v126.24,54.58
  Bottom 0.152: v18.42,60.37 18.42,62.05 15.9,64.57 PI-CON-1.2 | 40.7,12.18 40.74,12.22 40.74,14.35 40.21,14.88 38.91,14.88 37.31,13.28 ADC2-ADD.7 | 40.7,12.18 39.6,11.07 27.79,11.07 25.65,13.21 25.04,13.21 ADC1-ADD.7 | ADC3-ADD.7 48.97,13.36 47.3,11.68 41.2,11.68 40.7,12.18 | v12.01,65.94 12.01,65.48 11.79,65.25 11.79,21.21 12.93,20.06 v17.96,20.06 | v173.03,107.92 173.03,117.91 174.02,118.9 ADC3.1 | v144.22,71.27 144.22,69.44 150.62,63.04 v166.78,63.04 | v176.99,63.65 176.99,85.9 174.02,88.87 174.02,90.02 ADC2.1 | v108.56,43.31 v90.96,43.31 | v126.24,54.58 127.53,54.58 130.58,57.63 B-AMP.2
N$10
  Top 0.152: PLC-OK.1 68.1,75.61 63.91,75.61 R1.1
N$11  (via drill 0.35)
  Top 0.152: v109.7,22.58 116.56,29.44 139.95,29.44 144.53,34.01 145.9,34.01 F3.3
  Bottom 0.152: v109.7,22.58 107.42,22.58 107.11,22.27 105.05,22.27 102.01,19.23 B1.A15
N$12
  Top 0.152: F1.2 122.05,33.86 123.42,33.86 124.26,33.02 131.8,33.02 132.72,33.93 F2.2
  Bottom 0.152: F3.2 143.38,34.01 142.01,34.01 141.17,33.17 133.55,33.17 132.79,33.93 F2.2
N$13
  Top 0.152: F1.1 119.53,33.93 120.9,33.93 121.67,34.69 129.51,34.69 130.2,34.01 F2.1 130.28,34.01 131.12,34.85 135.53,34.85 136.3,34.09 140.87,34.09 F3.1
N$16
  Top 0.152: D38.1 83.34,33.7 93.55,33.7 104.45,44.6 B1.38
N$17
  Top 0.152: F-GASSES.4 164.49,66.47 164.49,65.33 166.17,63.65 166.17,53.67 173.94,45.9 ADC1.7
N$18
  Top 0.152: AUX1.1 22.3,86.82 22.3,85.44 14.68,77.82 14.68,69.52 11.4,66.24 11.4,58.85 13.23,57.02 PI-CON-1.7
N$19  (via drill 0.35)
  Top 0.152: v25.58,45.36 25.2,45.36 20.47,40.64 20.47,30.12 19.56,29.21 17.35,29.21 16.36,30.2 14.45,30.2 13.31,29.06 PI-CON-1.29
  Bottom 0.152: v25.58,45.36 29.77,49.55 29.77,67.77 33.2,71.19 33.2,86.74 AUX2.1
N$20
  Top 0.152: AUX3.1 44.02,86.59 44.02,85.37 28.47,69.82 28.47,66.39 23.06,60.98 18.11,60.98 17.04,59.92 17.04,59 16.21,58.16 15.37,58.16 14.53,57.33 14.53,56.49 13.69,55.65 12.85,55.65 11.48,54.28 11.48,28.29 13.23,26.54 PI-CON-1.31
N$21
  Top 0.152: AUX4.1 54.76,86.51 54.76,84.22 47.68,77.14 47.68,76.83 46.61,75.77 46.3,75.77 45.16,74.62 45.16,72.34 40.67,67.84 40.67,67 32.36,58.7 32.36,48.26 28.55,44.45 28.55,33.63 26.95,32.03 26.95,28.75 24.66,26.47 15.9,26.47 PI-CON-1.32
N$22
  Top 0.152: AUX2.16 25.65,86.74 26.57,85.82 34.04,85.82 34.8,86.59 36.4,86.59 AUX3.16 36.47,86.66 39.83,86.66 41.2,88.03 44.93,88.03 46.38,86.59 47.14,86.59 AUX4.16
  Bottom 0.152: AUX4.16 47.22,86.51 49.05,86.51 50.42,85.14 56.36,85.14 57.81,86.59 MASTER.16 | AUX2.16 25.58,86.82 24.66,87.73 21.62,87.73 20.78,86.89 14.76,86.89 AUX1.16 14.68,86.82 12.7,84.83 12.7,77.75 11.1,76.15 11.1,18.92 13.23,16.79 13.23,16.33 PI-CON-1.39
N$23
  Top 0.152: I2C-ENABLE.1 27.33,77.37 27.33,73.56 17.04,63.27 17.04,61.59 16.28,60.83 14.45,60.83 13.31,61.97 PI-CON-1.3
N$24
  Top 0.152: I2C-ENABLE.3 29.92,77.44 28.78,77.44 27.79,78.43 26.95,78.43 17.04,68.53 17.04,64.11 16.21,63.27 12.85,63.27 12.09,62.51 12.09,60.68 13.23,59.54 PI-CON-1.5
N$25
  Top 0.152: CO-LEV.4 154.2,26.08 154.2,28.9 168.61,43.31 173.94,43.31 ADC1.8
N$26
  Top 0.152: U$1.2 9.5,7.49 9.5,17.63 13.23,21.36 PI-CON-1.35
N$27  (via drill 0.35)
  Top 0.152: v127.53,17.7 123.88,17.7 122.73,16.56 121.97,16.56 FEILD2.5 121.89,16.56 120.98,17.47 119.53,17.47 v118.69,16.64 | v129.21,16.86 140.72,16.86 141.4,17.55 142.93,17.55 143.76,16.71 FEILD1.5 | v149.71,15.34 152.68,15.34 155.27,12.75 155.27,5.36 156.34,4.29 182.55,4.29 183.62,5.36 183.62,106.32 174.63,115.31 170.13,115.31 166.85,118.59 163.2,118.59 FEILD-RST.4 | v27.41,17.09 27.41,15.34 28.85,13.89 28.85,10.62 v32.21,7.26
  Bottom 0.152: v127.53,17.7 128.37,17.7 v129.21,16.86 | v149.71,15.34 147.96,15.34 147.27,14.65 144.45,14.65 143.84,15.26 143.84,16.64 FEILD1.5 | v27.41,17.09 27.41,24.1 25.43,26.08 FEILD--RESET.1 | v32.21,7.26 43.56,7.26 46.69,4.14 83.34,4.14 85.32,6.12 104.98,6.12 115.49,16.64 v118.69,16.64
N$28
  Bottom 0.152: CO-LEV1.4 164.34,82.7 164.34,82.55 169.06,77.82 169.06,74.24 171.5,71.8 171.5,58.09 171.04,57.63 171.04,43.69 173.94,40.79 ADC1.9
N$29  (via drill 0.35)
  Top 0.254: DC-BUSS.1 95,79.12 100.56,84.68 | 100.56,84.68 101.47,85.6 FEILD-1.1 | 100.56,84.68 94.62,90.63 FEILD-2.1 94.54,90.78 94.54,92 91.03,95.5 91.03,99.62 87.3,103.35 86.92,103.35 86.39,103.88 86.39,105.03 v86.69,105.33 91.34,105.33 94.46,102.21 PLC-PWR.1 | v163.35,9.24 163.35,9.32 161.6,11.07 H1-P-SEL.3 | v176.68,21.21 176.68,25.55 179.65,28.52 181.18,28.52 181.71,29.06 181.71,105.1 174.4,112.42 159.39,112.42 156.64,109.68 150.85,109.68 148.49,112.04 v108.94,112.04
  Bottom 0.254: 165.56,9.24 172.19,9.24 174.02,11.07 H2-P-SEL.3 | 165.56,9.24 v163.35,9.24 | v86.69,105.33 68.17,105.33 67.26,104.42 65.51,104.42 MASTER.8 | 165.56,9.24 165.56,13.59 167.77,15.8 169.29,15.8 170.36,16.86 170.36,19.84 171.42,20.9 176.38,20.9 v176.68,21.21 | v108.94,112.04 102.54,105.64 97.97,105.64 PLC-PWR.1
N$30  (via drill 0.35)
  Top 0.152: ADC3-ADD.1 ADC3-ADD.2 ADC3-ADD.3 ADC3-ADD.4 55.52,4.9 91.41,4.9 93.7,7.19 v101.7,7.19 | v151.38,16.18 149.1,18.46 149.1,18.54 145.29,22.35 v142.55,22.35 | v134.54,21.13 116.1,21.13 v113.44,18.46
  Bottom 0.152: ADC3.5 174.02,107.69 183.62,98.09 183.62,5.36 182.4,4.14 156.49,4.14 155.27,5.36 155.27,12.75 151.84,16.18 v151.38,16.18 | v142.55,22.35 135.76,22.35 v134.54,21.13 | v113.44,18.46 112.98,18.46 v101.7,7.19
N$31
  Bottom 0.152: D51.1 78.54,36.52 82.65,32.41 91.8,32.41 96.83,27.38 103.3,27.38 104.14,28.22 105.82,28.22 106.96,29.36 B1.51
N$32
  Bottom 0.152: D52.1 78.92,33.78 82.88,29.82 93.93,29.82 96.83,26.92 104.45,26.92 B1.52
N$33  (via drill 0.35)
  Top 0.152: v62.84,54.89 57.58,60.15 57.58,67.99 61.32,71.73 61.32,75.61 R1.2 | v73.97,43.76 v73.05,44.68
  Bottom 0.152: v73.05,44.68 v62.84,54.89 | v73.97,43.76 77.55,40.18 80.06,40.18 82.96,37.29 101.02,37.29 103.76,34.54 104.45,34.54 B1.46
N$34
  Top 0.152: D53.1 78,30.96 81.74,30.96 82.88,29.82 90.96,29.82 91.72,29.06 100.64,29.06 104.06,25.63 105.74,25.63 106.96,26.85 B1.53
N$35
  Top 0.152: D39.1 83.34,30.96 90.27,30.96 91.87,29.36 102.84,29.36 103.99,28.22 104.98,28.22 105.82,29.06 105.82,43.46 106.96,44.6 B1.39
N$36
  Top 0.152: D29.1 83.34,36.22 86.77,36.22 104.14,53.59 104.98,53.59 105.82,54.43 105.82,56.18 106.96,57.33 B1.29
N$37  (via drill 0.35)